# EAGLE board SCK_Base_v1.0 (EAGLE 6.4)
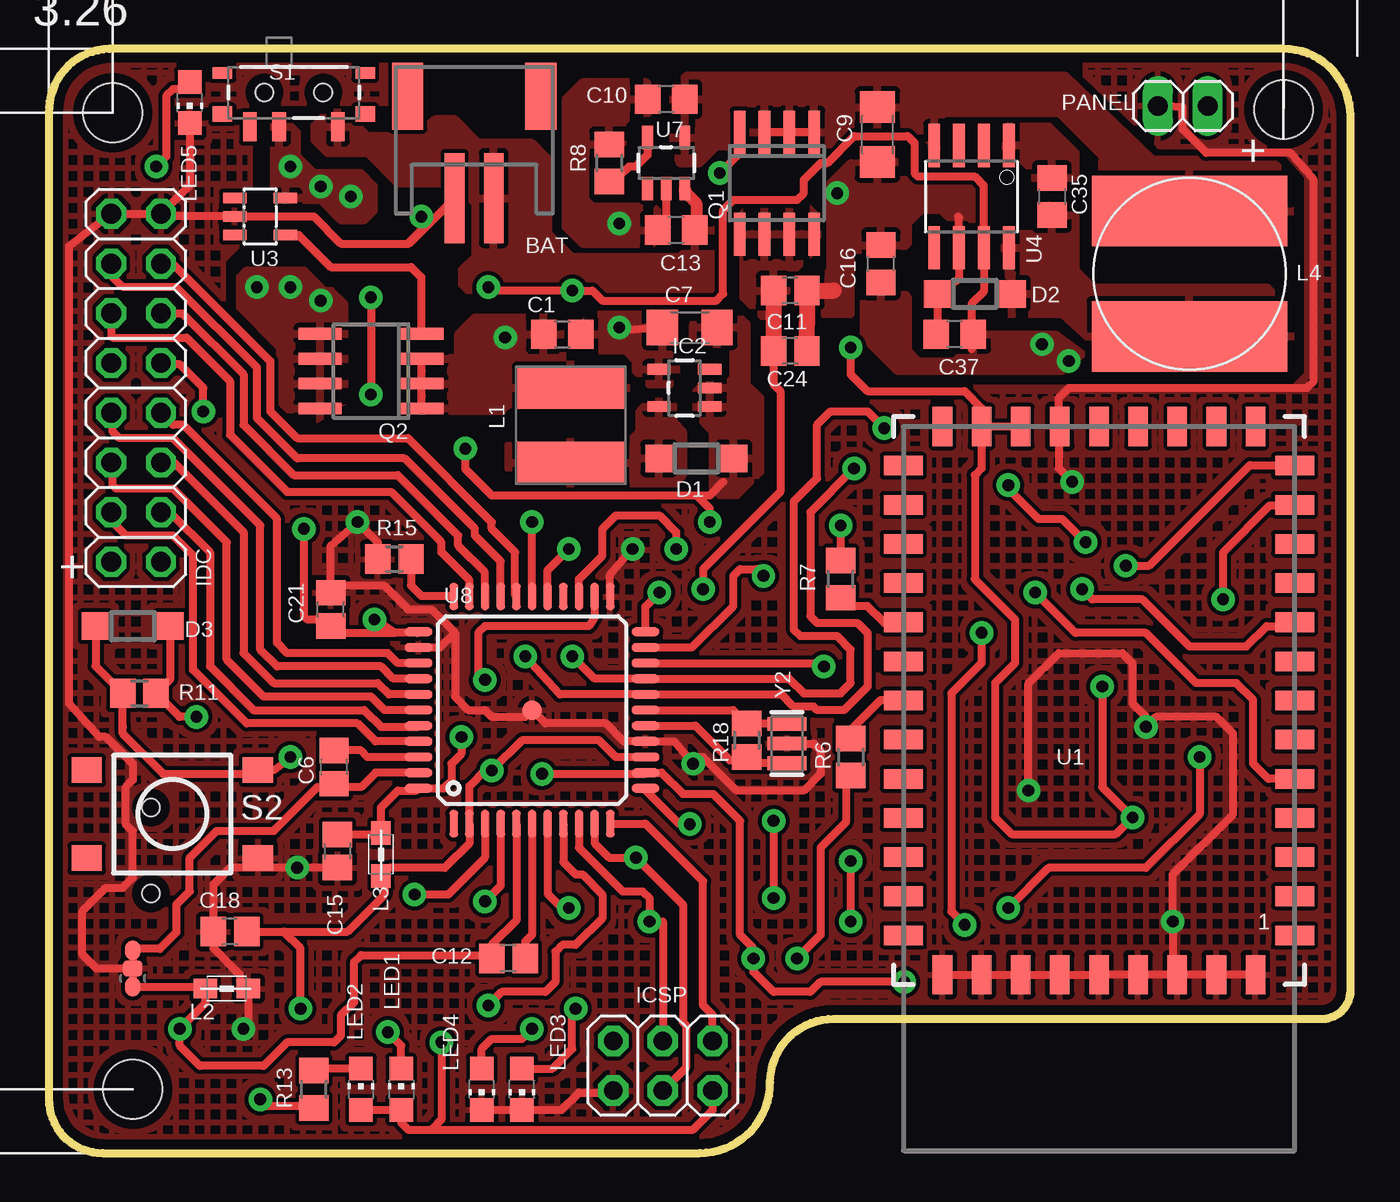
[diagram p0: board, top side]
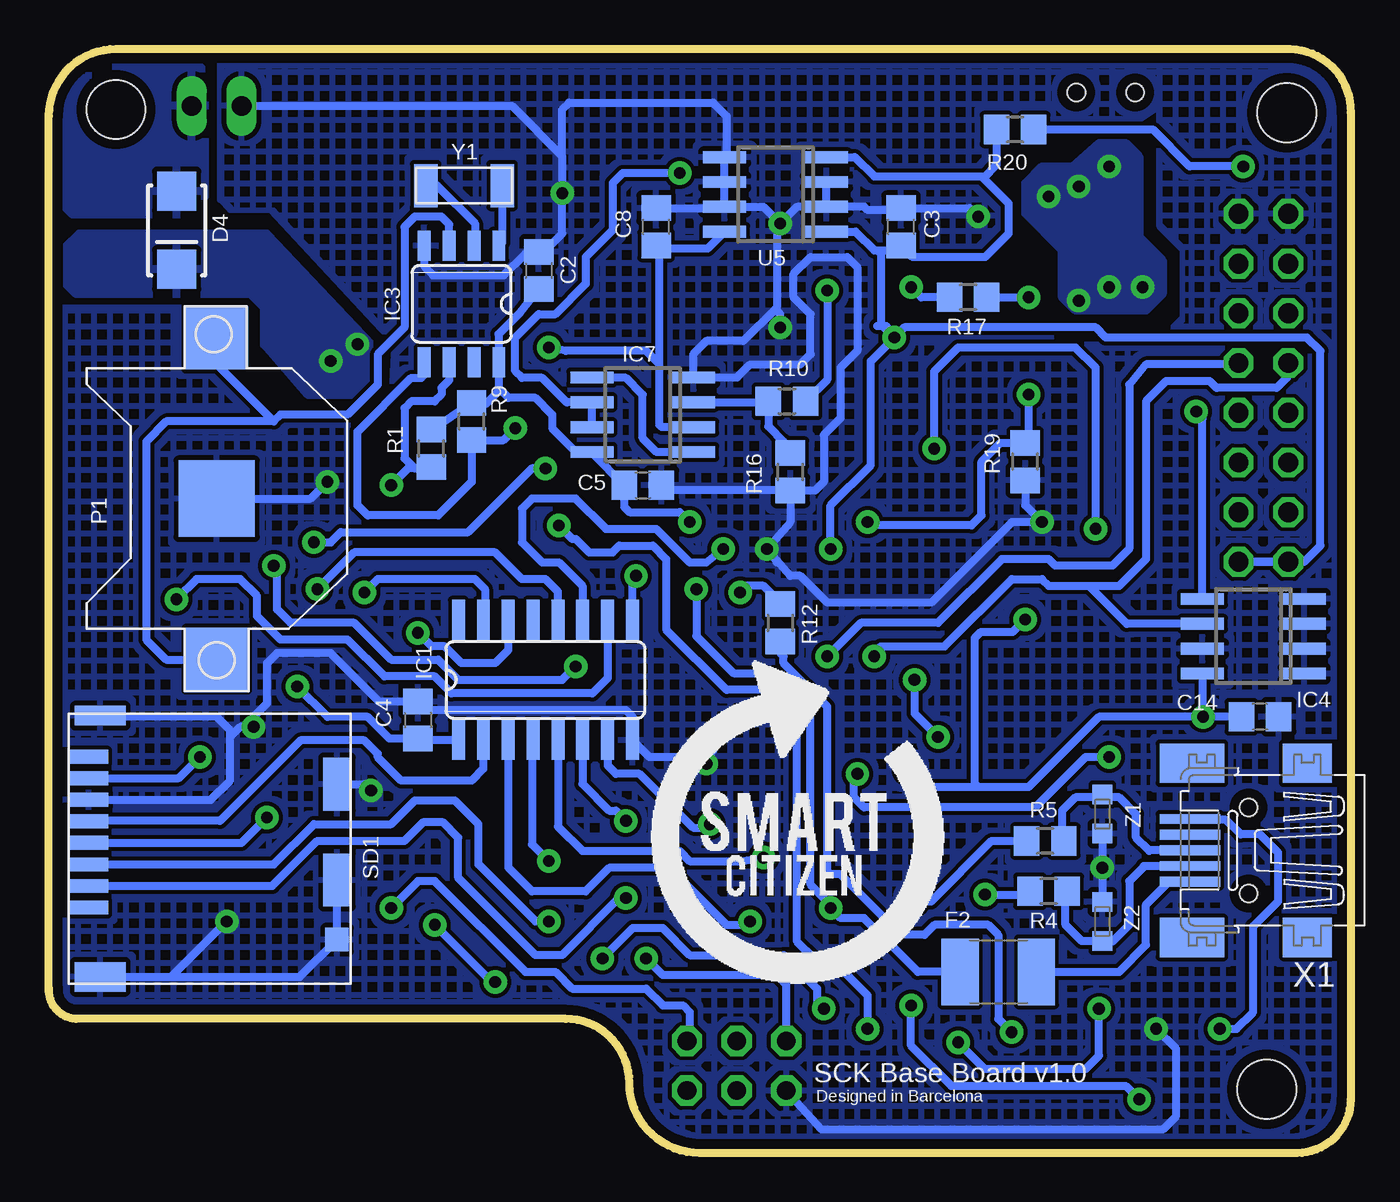
[diagram p1: board, bottom side, seen from below]

Size 66.52 x 56.41 mm. Coordinates in mm from the lower left corner, seen from the top.
Outline: 2.74,0 33.26,0 arc90 36.86,3.6 arc-90 40.12,6.86 65.15,6.86 arc90 66.52,8.4 66.52,52.98 arc90 63.09,56.41 3.09,56.41 arc90 0,53.15 0,2.74 arc90 2.74,0
Copper layers (1*16): Top 0.035mm / dielectric 1.5mm / Bottom 0.035mm
Design rules "default": minimum track width 6mil, minimum drill 0.6mm, track to track 8mil, track to pad 8mil, pad to pad 8mil, via to via 8mil, smd to smd 8mil, copper to edge 20mil, drill to drill 1mm, minimum pad ring 10mil, minimum via ring 0.3mm, stop-mask expansion 4mil, vias tented up to drill 0mil, thermal gap 10mil
Net classes: 1 power: width 0.254 mm, drill 0.6 mm, clearance 0.203 mm; 2 gnd: width 0.254 mm, drill 0.6 mm, clearance 0.203 mm; 3 usbvcc: width 0.254 mm, drill 0.6 mm, clearance 0.203 mm; 4 aref: width 0.254 mm, drill 0.6 mm, clearance 0.203 mm
Holes 3 mm at 3.26,53.15 4.29,3.26 63.09,53.32

## Footprints (pad centres in the part's own frame; a part is rotated, then mirrored left to right if it is on the bottom)
S2B-PH = smd 1 x 4.6: 1 -1,-3.7; 2 1,-3.7 | smd 1.6 x 3.4: NC1 -3.4,1.5; NC2 3.4,1.5
C0805 = smd 1.3 x 1.5: 1 -0.95,0; 2 0.95,0
C0805' = smd 1.3 x 1.5: 1 -0.85,0; 2 0.85,0
C1206 = smd 1.6 x 1.8: 1 -1.4,0; 2 1.4,0
SOD123 = smd 1.4 x 1.4: A 1.9,0; C -1.9,0
SMA-DIODE_ALT = smd 2 x 2: A -2,0; C 2,0
L1812 = smd 1.9 x 3.4: 1 -1.95,0; 2 1.95,0
SO16 = smd 0.66 x 2.032: 1 -4.445,-3.073; 2 -3.175,-3.073; 3 -1.905,-3.073; 4 -0.635,-3.073; 5 0.635,-3.073; 6 1.905,-3.073; 7 3.175,-3.073; 8 4.445,-3.073; 9 4.445,3.073; 10 3.175,3.073; 11 1.905,3.073; 12 0.635,3.073; 13 -0.635,3.073; 14 -1.905,3.073; 15 -3.175,3.073; 16 -4.445,3.073
SOT23-5 = smd 0.55 x 1.2: 1 -0.95,-1.3; 2 0,-1.3; 3 0.95,-1.3; 4 0.95,1.3; 5 -0.95,1.3
SO08-SKINNYPADS = smd 0.66 x 1.524: 1 -1.905,-2.973; 2 -0.635,-2.973; 3 0.635,-2.973; 4 1.905,-2.973; 5 1.905,2.973; 6 0.635,2.973; 7 -0.635,2.973; 8 -1.905,2.973
SO-08 = smd 0.6 x 2.2: 1 -1.905,-2.6; 2 -0.635,-2.6; 3 0.635,-2.6; 4 1.905,-2.6; 5 1.905,2.6; 6 0.635,2.6; 7 -0.635,2.6; 8 -1.905,2.6
SO08 = smd 0.6 x 2.2: 1 -1.905,-2.6; 2 -0.635,-2.6; 3 0.635,-2.6; 4 1.905,-2.6; 5 1.905,2.6; 6 0.635,2.6; 7 -0.635,2.6; 8 -1.905,2.6
2X03 = drill 0.95 pad 1.55 octagon: 1 -2.54,-1.27; 2 -2.54,1.27; 3 0,-1.27; 4 0,1.27; 5 2.54,-1.27; 6 2.54,1.27
2X08 = drill 1.016 octagon: 1 -8.89,-1.27; 2 -8.89,1.27; 3 -6.35,-1.27; 4 -6.35,1.27; 5 -3.81,-1.27; 6 -3.81,1.27; 7 -1.27,-1.27; 8 -1.27,1.27; 9 1.27,-1.27; 10 1.27,1.27; 11 3.81,-1.27; 12 3.81,1.27; 13 6.35,-1.27; 14 6.35,1.27; 15 8.89,-1.27; 16 8.89,1.27
C0R-JMP = smd 0.8 x 1: 1 0,0.938; 3 0,-0.938 | smd 1 x 0.8: 2 0,0
CR54 = smd 5.5 x 2.15: P$1 0,1.92; P$2 0,-1.92
0805 = smd 1.2 x 1: 1 -1.1,0; 2 1.1,0
SDR1006 = smd 10 x 3.6: 1 0,3.2; 2 0,-3.2
CHIP-LED0805 = smd 1.2 x 1.2: A 0,-1.05; C 0,1.05
CR1220-SMD = smd 3.2 x 3.2: +$1 -8.2,0; +$2 8.2,0 | smd 3.9 x 3.9: - 0,0
1X02 = drill 1.016 long: 1 -1.27,0; 2 1.27,0
R0805 = smd 1.3 x 1.5: 1 -0.95,0; 2 0.95,0
R0805' = smd 1.3 x 1.5: 1 -0.85,0; 2 0.85,0
SWITCH-SPST-SMD-A = smd 0.7 x 1.5: 1 -2.25,-1.75; 2 -0.75,-1.75; 3 2.25,-1.75 | smd 1 x 0.6: GND1 -3.65,1; GND3 3.65,1 | smd 1 x 0.8: GND2 -3.65,-1.1; GND4 3.65,-1.1 | hole 0.9: -1.5,0; 1.5,0
TACTILE_SWITCH_TALL = smd 1.55 x 1.3: A1 -4.375,-2.25; A2 4.375,-2.25; B1 -4.375,2.25; B2 4.375,2.25
DM3CS = smd 0.7 x 2: 1 2.54,-5.35; 2 1.44,-5.35; 3 0.34,-5.35; 4 -0.76,-5.35; 5 -1.86,-5.35; 6 -2.96,-5.35; 7 -4.06,-5.35; 8 -5.16,-5.35 | smd 1 x 2.6: 9 -7.26,-4.75 | smd 2.7 x 1.4: 10 -3.76,7.35; 11 1.14,7.35 | smd 1.2 x 1.2: 12 4.19,7.35 | smd 1.5 x 2.6: 13 6.09,-4.75
RN-131G = smd 2 x 1: P$1 -10,11; P$2 -10,9; P$3 -10,7; P$4 -10,5; P$5 -10,3; P$6 -10,1; P$7 -10,-1; P$8 -10,-3; P$9 -10,-5; P$10 -10,-7; P$11 -10,-9; P$12 -10,-11; P$13 -10,-13; P$23 10,-13; P$24 10,-11; P$25 10,-9; P$26 10,-7; P$27 10,-5; P$28 10,-3; P$29 10,-1; P$30 10,1; P$31 10,3; P$32 10,5; P$33 10,7; P$34 10,9; P$35 10,11 | smd 1 x 2: P$14 -8,-15; P$15 -6,-15; P$16 -4,-15; P$17 -2,-15; P$18 0,-15; P$19 2,-15; P$20 4,-15; P$21 6,-15; P$22 8,-15; P$36 8,13; P$37 6,13; P$38 4,13; P$39 2,13; P$40 0,13; P$41 -2,13; P$42 -4,13; P$43 -6,13; P$44 -8,13
SOT23-5L = smd 0.55 x 1.2: 1 -0.95,-1.3; 2 0,-1.3; 3 0.95,-1.3; 4 0.95,1.3; 5 -0.95,1.3
SO8 = smd 0.61 x 2.21: 1 -1.905,-2.616; 2 -0.635,-2.616; 3 0.635,-2.616; 4 1.905,-2.616; 5 1.905,2.616; 6 0.635,2.616; 7 -0.635,2.616; 8 -1.905,2.616
TQFP44-PAD = smd 1.4 x 0.45: 1 -5.8,4; 2 -5.8,3.2; 3 -5.8,2.4; 4 -5.8,1.6; 5 -5.8,0.8; 6 -5.8,0; 7 -5.8,-0.8; 8 -5.8,-1.6; 9 -5.8,-2.4; 10 -5.8,-3.2; 11 -5.8,-4; 23 5.8,-4; 24 5.8,-3.2; 25 5.8,-2.4; 26 5.8,-1.6; 27 5.8,-0.8; 28 5.8,0; 29 5.8,0.8; 30 5.8,1.6; 31 5.8,2.4; 32 5.8,3.2; 33 5.8,4 | smd 0.45 x 1.4: 12 -4,-5.8; 13 -3.2,-5.8; 14 -2.4,-5.8; 15 -1.6,-5.8; 16 -0.8,-5.8; 17 0,-5.8; 18 0.8,-5.8; 19 1.6,-5.8; 20 2.4,-5.8; 21 3.2,-5.8; 22 4,-5.8; 34 4,5.8; 35 3.2,5.8; 36 2.4,5.8; 37 1.6,5.8; 38 0.8,5.8; 39 0,5.8; 40 -0.8,5.8; 41 -1.6,5.8; 42 -2.4,5.8; 43 -3.2,5.8; 44 -4,5.8 | smd 1 x 1: P$1 0,0
32005-201 = smd 3.1 x 0.5: 1 3,1.6; 2 3,0.8; 3 3,0; 4 3,-0.8; 5 3,-1.6 | smd 2.5 x 2: M1 -3,-4.45; M2 -3,4.45 | smd 3.3 x 2: M3 2.9,4.45; M4 2.9,-4.45 | hole 0.9: 0,2.2; 0,-2.2
ABS10 = smd 1.2 x 2.2: 1 -1.9,-0.05; 2 2,-0.05
RESONATOR = smd 0.7 x 2: 1 -1,0; 2 0,0; 3 1,0
CT/CN0603 = smd 1 x 1: 1 -1,0; 2 1,0

## Placement (x,y rotation side)
BAT  [S2B-PH]  21.73,52.49 0 top
C1  10u  [C0805]  26.23,41.83 0 top
C2  100n  [C0805]  41.49,45.09 270 bottom
C3  10u  [C0805]  22.97,47.32 90 bottom
C4  100n  [C0805]  47.66,22.12 270 bottom
C5  100n  [C0805]  36.18,34.12 0 bottom
C6  100n  [C0805']  14.57,19.72 90 top
C7  100u  [C1206]  32.75,42.18 0 top
C8  10u  [C0805]  35.49,47.32 90 bottom
C9  22u  [C1206]  42.35,52.04 90 top
C10  4.7u  [C0805]  31.55,53.84 180 top
C11  10u  [C0805']  37.89,44.06 180 top
C12  1u  [C0805']  23.49,9.94 180 top
C13  4.7u  [C0805]  32.06,47.15 180 top
C14  100n  [C0805]  4.63,22.29 180 bottom
C15  1u  [C0805']  14.74,15.43 270 top
C16  1u  [C0805]  42.52,45.43 90 top
C18  100n  [C0805']  9.26,11.32 180 top
C21  100n  [C0805']  14.4,27.77 90 top
C24  100n  [C0805']  37.89,40.98 180 top
C35  10n  [C0805]  51.26,48.86 270 top
C37  100n  [C0805]  46.29,41.83 180 top
D1  MBR0520LT1G  [SOD123]  33.09,35.49 180 top
D2  MBR0520LT1G  [SOD123]  47.32,43.89 180 top
D3  1N4148  [SOD123]  4.29,26.92 180 top
D4  [SMA-DIODE_ALT]  60,47.14 270 bottom
F2  MF-MSMF050-2 500mA  [L1812]  18,9.26 0 bottom
IC1  4050D  [SO16]  41.15,24.17 0 bottom
IC2  [SOT23-5]  32.48,39.09 90 top
IC3  DS1307SOIC  [SO08-SKINNYPADS]  45.43,43.38 180 bottom
IC4  24LC256SN  [SO-08]  4.97,26.4 90 bottom
IC7  LM358D  [SO08]  36.18,37.72 90 bottom
ICSP  ICSP  [2X03]  31.38,4.46 180 top
IDC  [2X08]  4.46,39.09 90 top
JMP1  0R-JUMPC  [C0R-JMP]  4.29,9.43 180 top
L1  47uH  [CR54]  26.67,37.18 0 top
L2  MH2029-300Y  [0805]  9.09,8.4 0 top
L3  MH2029-300Y  [0805]  16.97,15.26 90 top
L4  82u  [SDR1006]  58.29,44.92 180 top
LED1  Yellow  [CHIP-LED0805]  18,3.26 0 top
LED2  Yellow  [CHIP-LED0805]  15.94,3.26 0 top
LED3  Blue  [CHIP-LED0805]  24.17,3.26 180 top
LED4  Blue  [CHIP-LED0805]  22.12,3.26 180 top
LED5  Green  [CHIP-LED0805]  7.2,53.66 180 top
P1  [CR1220-SMD]  57.95,33.43 90 bottom
PANEL  [1X02]  57.95,53.49 0 top
Q1  [SO-08]  37.2,49.55 180 top
Q2  [SO-08]  16.46,39.95 90 top
R1  4k7  [R0805]  46.98,36 90 bottom
R4  22  [R0805]  15.43,13.37 180 bottom
R5  22  [R0805]  15.6,15.94 180 bottom
R6  220  [R0805]  40.98,20.23 270 top
R7  220  [R0805]  40.46,29.32 90 top
R8  2k  [R0805]  28.63,50.58 270 top
R9  4k7  [R0805]  44.92,37.38 90 bottom
R10  10k  [R0805]  28.8,38.4 0 bottom
R11  10k  [R0805']  4.63,23.49 0 top
R12  1k  [R0805]  29.15,27.09 270 bottom
R13  1k  [R0805]  13.54,3.26 90 top
R15  10k  [R0805']  17.66,30.35 0 top
R16  10k  [R0805]  28.63,34.8 90 bottom
R17  20k  [R0805]  19.55,43.72 180 bottom
R18  1M  [R0805']  35.66,21.09 270 top
R19  10k  [R0805]  16.63,35.32 90 bottom
R20  1k  [R0805]  17.14,52.29 180 bottom
S1  [SWITCH-SPST-SMD-A]  12.52,54.18 0 top
S2  SWITCH-MOMENTARY-2  [TACTILE_SWITCH_TALL]  6.31,17.32 0 top
SD1  SD_CARD_SOCKETDM3CS  [DM3CS]  59.15,15.09 270 bottom
U1  RN-131G  [RN-131G]  53.66,22.12 180 top
U3  TPS2400  [SOT23-5L]  10.79,47.85 270 top
U4  LM2674  [SO8]  47.15,48.86 180 top
U5  MAX604ESA  [SO-08]  29.39,48.97 90 bottom
U7  MCP73831  [SOT23-5]  31.55,50.58 0 top
U8  ATMEGA32U4-XUAU  [TQFP44-PAD]  24.69,22.63 90 top
X1  MINI-USB-32005-201  [32005-201]  5.21,15.46 180 bottom
Y1  32.768KHz  [ABS10]  45.26,49.38 180 bottom
Y2  CSTCE16M0V53-R0 16MHZ  [RESONATOR]  37.72,20.92 90 top
Z1  CG0603MLC-05E  [CT/CN0603]  12.69,17.32 270 bottom
Z2  CG0603MLC-05E  [CT/CN0603]  12.69,11.83 90 bottom

## Library data of the parts
BAT U1 = SparkFun
C1-C5 C7-C10 C13 C14 C16 C35 C37 F2 R1 R4-R10 R12 R13 R16 R17 R19 R20 = rcl
C6 C11 C12 C15 C18 C21 C24 ICSP R11 R15 R18 U8 Y2 = SmartPrj
D1-D3 = diode
D4 = SparkFun-DiscreteSemi
IC1 = 40xx
IC2 L1 = SparkFunEagle-3-30-09
IC3 P1 = adafruit
IC4 = microchip; MF: MICROCHIP; MPN: 24LC256-I/SN; OC_FARNELL: 9757996; OC_NEWARK: 27C9144
IC7 = linear
IDC PANEL = pinhead
JMP1 = jump-0r-smd
L2 L3 = wuerth-elektronik
L4 SD1 U4 U5 Y1 = Hangar
LED1-LED5 = led
Q1 Q2 = transistor-power
S1 S2 = SparkFun 13-1-2012
U3 = texas-msp
U7 = SparkFun-PowerIC
X1 = con-cypressindustries; OC_FARNELL: unknown; OC_NEWARK: unknown
Z1 Z2 = varistor

## Nets
3V3: C4.2 C8.1 IC1.1 IC7.2 SD1.4 U1.P$20 U1.P$21 U5.8
+5V [usbvcc]: C2.2 C5.1 C7.2 C14.2 C18.1 C21.1 D1.C D3.C IC2.1 IC2.2 IC3.8 IC4.8 IC7.8 ICSP.2 L3.1 LED1.A LED2.A R1.2 R9.2 R11.2 U8.2 U8.14 U8.34
AGND: C6.1 JMP1.3 U8.43
AREF [aref]: C6.2 U8.42
AVCC: C15.1 L3.2 U8.24 U8.44
CS_MMC: IC1.7 U8.12
D7: U8.1
D12: U8.26
D+: R5.1 X1.3 Z1.1
D-: R4.1 X1.2 Z2.1
GATE_CMD: IC7.6 IC7.7 Q1.4
GND: BAT.1 C1.2 C2.1 C3.2 C4.1 C5.2 C7.1 C8.2 C9.1 C10.2 C11.1 C13.2 C14.1 C15.2 C16.2 C18.2 C21.2 C24.1 C37.2 D2.A IC1.8 IC2.4 IC3.4 IC4.1 IC4.2 IC4.3 IC4.4 IC4.7 IC7.4 ICSP.6 IDC.15 IDC.16 JMP1.2 L2.2 LED3.C LED4.C LED5.C P1.- PANEL.1 R8.1 R15.1 R16.1 R19.1 S2.A2 SD1.6 SD1.9 SD1.10 SD1.11 SD1.12 SD1.13 U1.P$19 U1.P$36 U1.P$37 U1.P$38 U1.P$39 U1.P$40 U1.P$41 U1.P$42 U1.P$43 U1.P$44 U3.2 U4.6 U5.2 U5.3 U5.5 U5.6 U5.7 U7.2 U8.15 U8.23 U8.35 U8.P$1 Y2.2 Z1.2 Z2.2
GPIO-4: R6.1 U1.P$29
GPIO-6: R7.1 U1.P$27
HWB: R15.2 U8.33
IO0: IDC.11 U8.31
IO1: IDC.12 U8.32
IO2: IDC.13 U8.29
IO3: IDC.14 U8.30
MISO: ICSP.1 SD1.7 U8.11
MOSI: IC1.5 ICSP.4 U8.10
N$1: IC1.10 U1.P$12
N$2 [usbvcc]: LED1.C R12.2
N$3 [power]: D4.A PANEL.2
N$4 [usbvcc]: LED2.C R13.2
N$5: IC7.3 R10.1 R16.2
N$6: LED4.A R7.2
N$7: IC7.1 IC7.5
N$8: LED3.A R6.2
N$9: IC1.6 SD1.2
N$11: IC1.2 SD1.5
N$12: IC1.4 SD1.3
N$13: R8.2 U7.5
N$14: IC1.12 U1.P$9
N$15: IC1.15 U1.P$5
N$16: IC3.1 Y1.1
N$17: IC3.2 Y1.2
N$18: IC3.3 P1.+$1 P1.+$2
N$19 [usbvcc]: C9.2 C10.1 L4.2 Q1.1 Q1.2 Q1.3 U4.4 U7.4
N$20: LED5.A R20.1
N$30: Q2.4 U3.4
N$31: D1.A IC2.5 L1.P$2
N$47: C35.1 U4.1
N$54: C35.2 D2.C L4.1 U4.8
P_LEVEL: R17.1 R19.2 U8.28
RD+: R5.2 U8.4
RD-: R4.2 U8.3
RESET: D3.A IC1.14 ICSP.5 R11.1 S2.B2 U8.13
RXBEE: U1.P$13 U8.20
RXLED: R13.1 U8.8
S0: IDC.3 U8.40
S1: IDC.4 U8.41
S2: IDC.5 U8.38
S3: IDC.6 U8.39
S4: IDC.7 U8.36
S5: IDC.8 U8.37
SCK: IC1.3 ICSP.3 U8.9
SCL: IC3.6 IC4.6 IDC.10 R1.1 U8.18
SDA: IC3.5 IC4.5 IDC.9 R9.1 U8.19
SLEEP: IC1.11 U8.25
TXBEE: IC1.9 U8.21
TXLED: R12.1 U8.22
UCAP: C12.1 U8.6
UGND [gnd]: C12.2 JMP1.1 L2.1 U8.5 X1.5
VBAT: BAT.2 C13.1 S1.3 U7.3
VBAT1: C1.1 C3.1 IDC.1 IDC.2 L1.P$1 Q2.1 Q2.2 Q2.3 R20.2 U5.1 U5.4 U8.27
VIN [power]: C16.1 C37.1 D4.C R10.2 R17.2 U4.7
VTPS: Q2.5 Q2.6 Q2.7 Q2.8 S1.2 U3.5
VUSB: C11.2 C24.2 F2.1 Q1.5 Q1.6 Q1.7 Q1.8 U8.7
XTAL1: R18.1 U8.17 Y2.3
XTAL2: R18.2 U8.16 Y2.1
XUSB [usbvcc]: F2.2 X1.1

## Tracks (layer width: path | path; a pad name or v marks a point on that pad's centre or on a via)
3V3  (via drill 0.6)
  Top 0.406: v53.84,23.83 53.84,18.69 v55.38,17.15 54.52,16.29 49.21,16.29 48.35,17.15 48.35,24 49.38,25.03 49.38,27.26 47.32,29.32 47.32,34.63 47.66,34.98 U1.P$21 | v40.98,41.15 40.98,39.78 41.83,38.92 46.81,38.92 47.66,38.06 U1.P$21 | U1.P$21 U1.P$20
  Bottom 0.406: 53.32,23.32 v53.84,23.83 52.29,22.29 50.23,22.29 49.11,21.17 C4.2 47.6,21.1 IC1.1 | v55.38,17.15 56.68,15.85 SD1.4 | IC7.2 35.2,37.08 35.32,37.21 35.32,40.29 | 35.32,40.29 35.32,43.14 35.33,43.15 35.33,46.21 | 35.33,46.21 C8.1 | 35.33,46.21 32.85,46.21 U5.8 | 35.32,40.29 36,40.98 40.12,40.98 v40.98,41.15
+5V  (via drill 0.6)
  Top 0.406: 17.66,26.58 14.74,26.58 C21.1 14.07,27.26 13.2,27.26 13.03,27.43 v13.03,31.89 | U8.34 18.83,26.58 17.66,26.58 | 17.66,26.58 v16.63,27.26 | v7.54,22.29 6.68,22.29 R11.2 6.19,24.2 D3.C | ICSP.2 33.92,2.2 32.92,1.2 19.55,1.2 | LED2.A LED1.A 18,1.54 18.35,1.2 19.55,1.2 | U8.14 28.97,20.23 28.12,21.09 24.17,21.09 v22.63,19.55 22.29,19.55 21.49,18.75 U8.2 21.49,15.83 20.23,14.57 17.39,14.57 L3.1 17.15,13.99 17.15,13.2 15.26,11.32 12,11.32 | v20.06,5.66 20.06,1.71 19.55,1.2 | C18.1 12,11.32 | v12.86,7.37 12.86,10.46 12,11.32 | 33.09,33.6 22.63,33.6 21.28,34.96 v21.28,35.99 | 33.09,33.6 33.78,33.6 34.46,34.29 | v33.78,32.23 33.78,32.92 33.09,33.6
  Bottom 0.406: R1.2 R9.2 44.83,38.23 44.23,38.23 43.55,38.92 43.55,39.09 | 43.49,40.4 IC3.8 43.55,40.42 | 43.55,40.42 43.55,39.09 | 43.55,39.09 43.03,38.58 41.66,38.58 40.81,37.72 40.81,37.03 39.61,35.83 38.8,35.83 IC7.8 38.78,35.77 C5.1 37.13,33.01 36.86,32.75 34.29,32.75 v33.78,32.23 | C2.2 42.44,42.94 43.55,41.83 43.55,40.42 | v13.03,31.89 13.03,40.12 14.06,41.15 20.06,41.15 21.28,39.93 v21.28,35.99 | v20.06,5.66 18.69,4.29 13.54,4.29 12.86,4.97 v12.86,7.37 | v7.54,22.29 12.86,22.29 16.46,18.69 19.03,18.69 | 19.03,18.69 21.77,18.69 v22.63,19.55 | 19.03,18.69 19.2,18.86 19.2,26.32 U8.34 17.26,26.63 v16.63,27.26 | C14.2 v7.54,22.29 | IC4.8 7.57,22.32 v7.54,22.29
  pour Top: 32.92,41.66 32.92,42.35 33.43,42.86 35.15,42.86 35.66,42.35 35.66,39.26 36.35,38.58 36.35,34.8 35.15,33.6 34.29,33.6 33.95,33.95 33.95,36.86 33.09,37.72 33.09,38.92 33.43,39.26 34.63,39.26 34.98,39.6 34.98,40.98 34.63,41.32 33.26,41.32
AGND
  Top 0.406: U8.43 16.69,19.43 15.94,18.69 14.75,18.69 C6.1 14.39,18.69 13.72,18.69 11.49,16.46 8.57,16.46 7.2,15.09 7.2,13.37 6.52,12.69 6.52,11.27 5.67,10.43 4.34,10.43 JMP1.3
AREF
  Top 0.406: U8.42 16.29,20.23 15.94,20.57 14.58,20.57 C6.2
AVCC  (via drill 0.6)
  Top 0.406: C15.1 16.97,16.28 L3.2 16.97,17.66 17.83,18.52 18.77,18.52 U8.44 20.17,18.63 20.57,19.03 20.57,19.89 21.09,20.4 v21.09,21.26 | U8.24 27.89,27.37 27.6,26.92 22.29,26.92 21.95,26.58 21.95,24.52 v22.29,24.17
  Bottom 0.406: v22.29,24.17 22.29,22.46 v21.09,21.26
CS_MMC  (via drill 0.6)
  Top 0.406: U8.12 30.49,18.55 32.23,16.8 v32.75,16.8
  Bottom 0.406: IC1.7 37.97,19.8 37.55,19.37 36.35,19.37 33.6,16.63 32.92,16.63 v32.75,16.8
D+
  Bottom 0.406: 14.62,15.97 R5.1 14.74,16.04 14.74,17.49 14.06,18.17 12.66,18.17 | 12.66,18.17 11.83,18.17 10.97,17.32 10.97,16.12 10.29,15.43 10.29,15.46 X1.3 | 12.66,18.17 Z1.1
D-
  Bottom 0.406: R4.1 14.57,13.28 14.57,11.66 13.74,10.83 Z2.1 12.66,10.8 12.17,10.8 11.32,11.66 11.32,13.89 10.57,14.63 10.57,14.66 X1.2
GATE_CMD  (via drill 0.6)
  Top 0.406: Q1.4 35.3,51.07 v34.29,50.06
  Bottom 0.406: IC7.7 IC7.6 40.07,38.35 41.32,39.61 42.35,39.61 42.69,39.95 42.69,41.66 41.49,42.86 40.63,42.86 39.09,44.41 39.09,45.78 37.72,47.15 37.72,49.55 37.2,50.06 v34.29,50.06
GND  (via drill 0.6)
  Top 0.406: C21.2 14.4,31.03 v15.77,32.23 16.8,31.2 R15.1 | 20.75,26.58 19.55,27.78 18.35,27.78 17.15,28.98 14.41,28.98 C21.2 | U8.35 20,25.83 20.75,26.58 | C21.2 14.22,28.8 | ICSP.6 28.73,3.09 27.09,3.09 26.21,2.21 LED3.C LED4.C | C15.2 v12.69,14.58 9.27,14.58 8.4,13.72 8.4,11.32 C18.2 8.41,10.45 9.77,9.09 9.77,8.82 L2.2 10.19,6.59 v9.94,6.34 | IDC.15 IDC.16 1.03,46.34 1.03,22.97 2.57,21.26 2.91,21.26 4.29,19.89 4.29,19.06 3.93,18.71 3.93,16.8 4.29,16.44 4.29,14.06 3.77,13.54 2.91,13.54 1.71,12.34 1.71,10.15 2.43,9.44 JMP1.2 | C37.2 45.42,42.6 D2.A 46.51,44.64 U4.6 46.51,47.78 46.46,47.83 | IDC.15 5.86,47.85 U3.2 13.53,47.85 14.92,46.46 18.41,46.46 | 18.41,46.46 BAT.1 | 20.75,26.58 20.75,23.32 21.43,22.63 22.29,22.63 22.63,22.29 24.35,22.29 U8.P$1 25.37,21.95 28.46,21.95 29.37,21.03 U8.15 31.95,21.03 v32.92,19.89 33.26,20.23 33.43,20.23 35.15,18.52 38.58,18.52 39.43,19.37 39.43,20.57 39.09,20.92 Y2.2 | C7.1 29.32,42.01 v29.15,42.18 | 18.41,46.46 18.41,46.52 19.2,47.32 19.2,47.66 v19.03,47.83 | U1.P$36 U1.P$37 U1.P$38 U1.P$39 U1.P$40 U1.P$41 U1.P$42 | U1.P$42 U1.P$43 U1.P$44 | U1.P$42 57.44,9.35 v57.44,11.83 57.44,14.23 60.52,17.32 60.52,21.43 59.66,22.29 56.58,22.29 v56.06,21.77 56.06,22.29 55.38,22.97 55.38,25.03 54.86,25.55 51.61,25.55 50.06,24 v50.06,18.52 | 51.61,37.06 U1.P$19 | U8.23 28.69,29.55 v29.83,30.86 | 51.61,37.06 51.61,34.98 v52.29,34.29 | C24.1 | LED5.C 7.2,49.45 IDC.15 | 51.61,37.06 51.61,38.58 52.12,39.09 64.29,39.09 64.64,39.43 64.64,49.72 63.44,51.09 59.15,51.09 57.95,52.29 57.95,53.42 PANEL.1 | U7.2 31.55,47.58 C13.2 | JMP1.2 4.29,8.57
  Top 0.406: 4.29,10.29 JMP1.2
  Top 0.813: C24.1 38.75,42.39 38.74,42.4 C11.1 40.12,44.06
  Bottom 0.406: R16.1 34.98,33.85 C5.2 | U5.7 U5.6 U5.5 31.89,50.98 31.89,52.98 32.58,53.66 39.95,53.66 40.29,53.32 40.29,50.92 | 35.28,48.48 C8.2 | 29.4,43.12 29.32,43.21 29.32,47.32 v29.15,47.49 | 29.4,43.12 31.03,41.49 32.92,41.49 33.6,40.81 33.6,39.65 IC7.4 31.36,39.62 30.69,40.29 28.12,40.29 27.6,40.81 27.6,42.86 28.46,43.72 28.46,44.92 27.6,45.78 25.72,45.78 25.2,45.26 25.2,40.98 26.06,40.12 26.06,37.55 26.92,36.69 26.92,34.29 27.35,33.85 R16.1 | v19.03,47.83 19.47,48.27 C3.2 23.07,48.18 24.69,48.18 24.86,48.35 U5.2 | v29.15,42.18 29.15,42.86 29.4,43.12 | v57.44,11.83 60.27,9 SD1.13 53.7,9 SD1.12 SD1.11 | SD1.6 58.25,18.05 57.26,19.03 57.26,21.26 | 57.26,21.26 57.26,21.6 57.95,22.29 63.84,22.29 SD1.9 | 57.26,21.26 56.75,21.77 v56.06,21.77 56.06,22.29 55.38,22.97 55.38,25.03 54.86,25.55 52.12,25.55 49.64,23.07 C4.1 47.23,22.63 37.03,22.63 36.69,22.29 36.69,21.11 IC1.8 35.83,20.23 32.92,20.23 32.58,20.57 v32.92,19.89 | SD1.10 50.39,18.85 v50.06,18.52 | Z2.2 Z1.2 v12.69,14.58 | P1.- 53.15,33.43 v52.29,34.29 | R16.1 28.63,32.23 v29.83,30.86 | IC3.4 47.32,46.33 47.32,45.26 46.9,44.84 43.28,44.84 42.18,45.95 41.58,45.95 C2.1 41.23,46.04 40.29,46.98 v40.29,49.04 40.29,50.92 | R19.1 16.63,33.09 v15.77,32.23 17.32,32.23 21.43,28.12 26.75,28.12 28.12,29.49 28.63,29.49 v29.83,30.86 | ICSP.6 27.02,1.2 9.6,1.2 8.92,1.89 8.92,5.32 v9.94,6.34 | 28.81,47.48 v29.15,47.49 | 29.48,47.48 v29.15,47.49 | 35.01,48.75 C8.2 | U5.2 U5.3 | U5.7 29.99,48.34 v29.15,47.49 | U5.2 28.3,48.34 v29.15,47.49 | 29.32,30.18 v29.83,30.86 | PANEL.1 42.86,53.49 40.29,50.92 | C8.2 32.06,48.27 U5.7
  pour Bottom (hatched): -2.4,56.24 -2.91,-1.37 66.87,-1.71 67.21,42.69 66.69,43.21 57.09,43.21 56.75,42.86 56.75,40.98 56.24,40.46 56.24,40.29 53.84,37.89 49.03,37.89 48.86,41.32 55.21,48.18 57.26,48.18 57.78,48.69 57.78,56.41 57.26,56.92 48.18,56.92 10.97,56.41 9.94,55.89 9.94,53.32 10.97,52.64 13.03,52.64 14.23,51.44 16.12,51.44 17.49,50.06 17.49,47.49 15.77,45.78 15.77,42.18 14.92,41.32 9.94,41.32 8.57,42.69 8.57,46.12 9.77,47.32 9.77,55.89 9.43,56.24
  pour Top (hatched): 66.87,56.06 52.98,56.24 52.98,55.04 56.75,51.44 62.92,51.44 64.29,49.89 64.29,39.78 63.61,39.09 37.72,39.09 37.2,38.58 37.2,34.29 35.49,32.58 33.43,32.58 32.75,33.26 23.32,33.26 22.29,34.29 22.29,36.52 21.95,36.86 12.34,36.86 11.14,38.06 11.32,40.46 8.92,42.86 8.92,45.61 10.29,46.98 10.29,52.64 11.32,53.66 21.43,53.66 21.95,53.15 25.55,53.15 25.55,54.18 23.49,56.24 -2.06,56.06 -2.06,-1.37 66.87,-1.37
  pour Top: 39.6,42.86 39.6,44.75 39.95,45.09 39.95,49.55 40.98,50.58 41.49,50.58 42.01,51.09 42.86,51.09 43.21,50.75 43.21,50.23 43.72,49.72 48.69,49.72 48.86,49.55 48.86,48.86 47.49,47.49 46.29,47.49 45.61,48.18 44.58,48.18 43.89,47.49 43.89,46.46 43.55,46.12 41.15,46.12 40.98,45.95 40.98,42.86
  pour Top: 31.03,53.49 31.03,54.18 30.52,54.69 27.26,54.69 26.4,53.84 26.4,47.32 27.26,46.46 30.86,46.46 31.03,46.63 30.69,46.98 31.72,47.49 30.86,48.35 27.77,48.35 27.43,48.69 27.43,50.75 27.77,51.09 28.8,51.09 29.32,51.61 29.32,52.64 29.83,53.15 30.69,53.15
  pour Top: 27.26,41.49 27.26,42.35 27.77,42.86 31.2,42.86 31.55,42.52 31.55,40.98 32.06,40.46 32.06,39.6 31.72,39.26 30.69,39.26 30,39.95 30,40.46 29.49,40.98 27.77,40.98
GPIO-4
  Top 0.406: R6.1 40.98,21.6 42.52,23.15 43.64,23.15 U1.P$29
GPIO-6
  Top 0.406: U1.P$27 43.64,27.09 42.69,27.09 41.83,27.95 40.54,27.95 R7.1
HWB
  Top 0.406: R15.2 18.51,28.98 19.03,28.46 20.66,28.46 U8.33
IO0
  Top 0.406: IDC.11 6.82,42.9 9.94,39.78 9.94,37.21 12.52,34.63 17.83,34.63 20.92,31.55 20.92,31.03 22.29,29.66 U8.31
IO1
  Top 0.406: IDC.12 3.19,41.73 3.26,41.66 7.03,41.66 9.26,39.43 9.26,36.69 12.17,33.78 17.49,33.78 20.06,31.2 20.06,30.69 21.49,29.26 U8.32
IO2
  Top 0.406: IDC.13 6.34,45.44 11.32,40.46 11.32,37.89 12.69,36.52 18.35,36.52 22.63,32.23 22.63,31.89 23.83,30.69 23.83,28.49 U8.29
IO3
  Top 0.406: IDC.14 3.26,45.37 3.26,44.75 3.77,44.23 6.52,44.23 10.63,40.12 10.63,37.55 12.69,35.49 18.17,35.49 21.77,31.89 21.77,31.55 23.09,30.23 U8.30
MISO  (via drill 0.6)
  Top 0.406: ICSP.1 33.92,7.06 33.43,7.54 33.43,13.89 30.49,16.83 U8.11 | v58.81,20.23 58.81,17.32 56.06,14.57 51.09,14.57 v49.03,12.52
  Bottom 0.406: SD1.7 59.89,19.15 v58.81,20.23 | ICSP.1 33.78,5.87 33.78,7.2 34.12,7.54 35.15,7.54 36,8.4 39.78,8.4 40.63,9.26 42.18,9.26 46.81,13.89 47.66,13.89 v49.03,12.52
MOSI  (via drill 0.6)
  Top 0.406: U8.10 27.89,15.83 28.63,15.09 v30,15.09 32.4,12.69 32.4,6.69 32.58,6.52 32.58,4.39 ICSP.4
  Bottom 0.406: IC1.5 40.51,16.68 39.26,15.43 34.29,15.43 33.78,14.92 31.2,14.92 v30,15.09
N$1  (via drill 0.6)
  Top 0.406: v60.01,28.29 60.01,30.69 62.41,33.09 63.64,33.09 U1.P$12
  Bottom 0.406: IC1.10 37.97,24.26 38.75,23.49 45.95,23.49 46.81,24.35 49.38,24.35 51.26,26.23 54.69,26.23 55.89,27.43 55.89,28.46 56.75,29.32 58.98,29.32 v60.01,28.29
N$2  (via drill 0.6)
  Top 0.406: LED1.C 18,5.49 v17.32,6.17
  Bottom 0.406: R12.2 29.15,25.55 28.98,25.38 28.98,25.03 26.75,22.8 26.75,14.4 26.57,14.23 26.06,14.23 22.97,11.14 21.77,11.14 21.26,11.66 18.52,11.66 18,11.14 18,6.86 v17.32,6.17
N$3
  pour Bottom: 58.43,55.08 58.43,55.14 58.84,55.54 64.11,55.54 65.15,54.5 65.15,54.44 66.02,53.57 66.02,48.65 65.32,47.95 59.47,47.95 58.55,48.88 58.55,54.9 58.49,54.96
N$4
  Top 0.406: LED2.C 13.54,4.31 R13.2
N$5
  Bottom 0.406: IC7.3 29.8,38.35 R10.1 29.75,37.13 28.98,36.35 28.98,36.1 R16.2
N$6  (via drill 0.6)
  Top 0.406: LED4.A 22.12,5.32 22.63,5.83 24.17,5.83 v24.69,6.34 | v40.46,32.06 R7.2
  Bottom 0.406: v24.69,6.34 24.69,8.06 26.57,9.94 27.43,9.94 28.29,10.8 28.29,22.29 29.66,23.66 31.89,23.66 34.98,26.75 34.98,30.35 35.66,31.03 37.38,31.03 37.72,30.69 38.92,30.69 39.61,31.38 39.78,31.38 v40.46,32.06
N$7
  Bottom 0.406: IC7.1 35.47,35.81 36.18,36.52 36.18,38.75 37.03,39.61 38.76,39.61 IC7.5
N$8  (via drill 0.6)
  Top 0.406: R6.2 40.73,19.03 40.73,16.9 39.43,15.6 39.43,11.14 v38.23,9.94 38.75,10.46 | LED3.A 25.74,4.31 26.75,5.32 26.75,7.2 v26.92,7.37
  Bottom 0.406: v26.92,7.37 27.26,7.72 27.26,8.4 28.98,10.12 33.78,10.12 35.15,11.49 36.69,11.49 v38.23,9.94
N$9  (via drill 0.6)
  Top 0.406: v37.03,16.97 v37.03,13.03
  Bottom 0.406: SD1.2 55.1,13.65 52.81,15.95 48.35,15.95 47.41,16.89 46.38,16.89 45.61,16.12 45.61,14.06 41.66,10.12 40.29,10.12 37.38,13.03 v37.03,13.03 | IC1.6 39.26,21.08 39.26,18.86 37.89,17.49 37.55,17.49 v37.03,16.97
N$11
  Bottom 0.406: IC1.2 44.32,19.63 44.92,19.03 48.52,19.03 49.72,20.23 49.72,20.4 50.41,21.09 53.66,21.09 57.78,16.97 64.47,16.97 SD1.5
N$12  (via drill 0.6)
  Top 0.406: v40.98,14.92 v40.98,11.83
  Bottom 0.406: SD1.3 55.03,14.75 52.98,16.8 49.03,16.8 47.83,18 45.78,18 44.58,16.8 44.58,14.75 41.66,11.83 v40.98,11.83 | IC1.4 41.83,21.05 41.83,15.77 v40.98,14.92
N$13
  Top 0.406: R8.2 28.9,49.89 29.15,49.89 29.66,50.41 30,50.41 30.6,51 U7.5
N$14  (via drill 0.6)
  Top 0.406: 63.64,27.09 U1.P$9 63.46,26.92 62.24,26.92 61.21,25.89 58.29,25.89 55.89,28.29 53.32,28.29 v52.81,28.8
  Bottom 0.406: IC1.12 40.51,28.68 41.15,29.32 42.35,29.32 43.72,30.69 50.92,30.69 v52.81,28.8
N$15  (via drill 0.6)
  Top 0.406: U1.P$5 62.32,19.12 61.55,19.89 61.55,23.15 60.69,24 58.64,24 56.06,26.58 52.46,26.58 v50.41,28.63
  Bottom 0.406: IC1.15 44.23,27.34 44.23,28.8 44.75,29.32 49.72,29.32 v50.41,28.63
N$16
  Bottom 0.406: Y1.1 43.36,46.52 IC3.1
N$17
  Bottom 0.406: Y1.2 46.68,49.43 44.75,47.49 44.75,46.4 IC3.2
N$18
  Bottom 0.406: IC3.3 46.07,47.44 46.46,47.83 47.83,47.83 48.35,47.32 48.35,42.18 49.72,40.81 49.72,39.26 51.26,37.72 54.69,37.72 55.04,37.38 | 55.04,37.38 57.95,40.29 P1.+$2 | 55.04,37.38 60.52,37.38 61.55,36.35 61.55,26.23 60.52,25.2 57.98,25.2 P1.+$1
N$19
  Top 0.406: Q1.1 Q1.2 Q1.3
  pour Top: 54.01,47.49 62.92,47.49 63.44,48.01 63.44,49.89 62.41,50.75 56.41,50.75 51.95,55.04 32.58,55.04 31.89,54.35 31.89,51.26 32.23,50.58 33.26,50.58 34.12,51.44 40.46,51.44 41.32,52.29 43.38,52.29 43.55,52.46 44.23,52.46 45.09,51.61 45.09,50.75 45.43,50.75 45.26,52.64 45.78,53.15 51.61,53.15 53.84,50.92 53.66,47.83
N$20  (via drill 0.6)
  Top 0.406: LED5.A 6.84,54.35 6.34,54.35 6,54.01 6,50.92 v5.49,50.41
  Bottom 0.406: R20.1 10.12,52.29 8.23,50.41 v5.49,50.41
N$30
  Top 0.406: U3.4 12.77,46.9 14.4,45.26 18.52,45.26 19.03,44.75 19.03,41.88 Q2.4
N$31
  pour Top: 23.66,36.35 29.66,36.35 30.18,36.86 30.18,37.89 30.69,38.4 31.72,38.4 31.89,38.23 31.89,37.38 32.4,36.86 32.4,34.63 31.89,34.12 24.35,34.12 23.49,34.98 23.49,36.18
N$47
  pour Top: 49.03,52.46 51.09,52.46 52.46,51.09 52.46,49.89 51.95,49.38 50.75,49.38 50.41,49.72 50.41,50.06 49.72,50.75 49.21,50.75 48.86,51.09
N$54
  pour Top: 48.52,42.86 48.52,44.58 48.86,44.92 48.86,46.98 50.58,46.98 50.92,48.52 52.46,47.83 52.46,45.09 53.32,44.23 62.24,44.23 63.44,43.03 63.44,41.15 62.75,40.46 54.01,40.81 51.78,42.86
P_LEVEL  (via drill 0.6)
  Top 0.406: U8.28 v24.69,32.23 | v16.46,43.72 v16.46,38.75
  Bottom 0.406: v24.69,32.23 24.69,32.06 19.37,32.06 18.86,32.58 18.86,35.33 17.92,36.27 R19.2 16.46,36.44 v16.46,38.75 | R17.1 v16.46,43.72
RD+  (via drill 0.6)
  Top 0.406: U8.4 23.09,13.66 v22.29,12.86
  Bottom 0.406: v22.29,12.86 21.43,12.86 18.35,15.95 R5.2
RD-  (via drill 0.6)
  Top 0.406: U8.3 22.29,15.09 20.4,13.2 v18.69,13.2
  Bottom 0.406: v18.69,13.2 16.55,13.2 R4.2
RESET  (via drill 0.6)
  Top 0.406: v12.34,20.23 11.51,19.57 10.28,19.57 S2.B2 10.13,19.57 10.13,19.37 5.83,19.37 3.77,21.43 3.77,21.77 R11.1 2.39,24.88 D3.A | v25.2,19.37 30.43,19.37 U8.13 31.32,19.43 32.4,18.35 33.95,18.35 35.32,16.97 35.32,11.14 36,10.46 v36,9.94 36,9.26 37.03,8.23 38.92,8.23 39.43,8.74 v43.72,8.74 | v47.66,26.58 47.66,25.03 46.12,23.49 46.12,12.34 v46.81,11.66
  Bottom 0.406: ICSP.5 28.84,8.6 29.32,9.09 35.15,9.09 v36,9.94 | v12.34,20.23 13.54,20.23 16.12,17.66 24.86,17.66 25.37,18.17 25.37,19.2 v25.2,19.37 | IC1.14 43.05,25.7 43.72,25.03 45.43,25.03 46.29,25.89 46.98,25.89 v47.66,26.58 | v43.72,8.74 43.89,8.74 v46.81,11.66
RXBEE  (via drill 0.6)
  Top 0.406: U8.20 39.43,25.03 v39.61,24.86 | v55.04,30 56.24,30 61.38,35.15 63.63,35.15 U1.P$13
  Bottom 0.406: v55.04,30 54.86,29.83 54.86,27.78 54.18,27.09 50.92,27.09 49.03,25.2 46.63,25.2 45.61,24.17 40.29,24.17 v39.61,24.86
RXLED  (via drill 0.6)
  Top 0.406: U8.8 26.29,14.86 26.92,14.23 27.26,14.23 28.29,13.2 28.29,12 26.92,10.63 26.23,10.63 25.89,10.29 25.89,8.74 25.37,8.23 23.15,8.23 v22.46,7.54 | R13.1 13.45,2.4 11.14,2.4 v10.8,2.74
  Bottom 0.406: v10.8,2.74 11.49,3.43 20.4,3.43 22.46,5.49 v22.46,7.54
S0
  Top 0.406: IDC.3 6.18,32.74 8.23,30.69 8.23,24.86 10.46,22.63 16.12,22.63 16.97,21.77 18.83,21.77 U8.40
S1
  Top 0.406: U8.41 16.69,21.03 15.77,21.95 10.12,21.95 7.37,24.69 7.37,30.52 6.34,31.55 3.94,31.55 3.26,32.23 3.26,32.67 IDC.4
S2
  Top 0.406: IDC.5 6.38,35.28 9.94,31.72 9.94,25.55 11.49,24 16.8,24 17.37,23.43 U8.38
S3
  Top 0.406: U8.39 17.15,22.63 16.46,23.32 10.97,23.32 9.09,25.2 9.09,31.2 6.34,33.95 3.43,33.95 3.26,34.12 3.26,35.21 IDC.6
S4
  Top 0.406: U8.36 17.83,25.03 17.32,25.55 12.17,25.55 11.66,26.06 11.66,32.4 6.86,37.21 6.34,37.21 IDC.7
S5
  Top 0.406: U8.37 17.6,24.23 16.97,24.86 11.66,24.86 10.8,25.72 10.8,32.06 6.34,36.52 3.6,36.52 3.26,36.86 3.26,37.75 IDC.8
SCK  (via drill 0.6)
  Top 0.406: U8.9 27.09,15.6 29.32,13.37 30.35,13.37 30.69,13.03 v30.69,11.83 31.38,11.83 ICSP.3
  Bottom 0.406: IC1.3 43.05,14.59 41.83,13.37 39.09,13.37 37.89,14.57 34.8,14.57 31.89,11.66 30.86,11.66 v30.69,11.83
SCL  (via drill 0.6)
  Top 0.406: v41.15,34.98 38.92,32.75 38.92,27.43 39.26,27.09 41.32,27.09 41.83,26.58 41.83,23.83 40.63,22.63 39.26,22.63 39.09,22.8 38.06,22.8 37.38,23.49 37.32,23.43 U8.18 26.12,23.43 v24.35,25.38 | v49.03,34.12 49.03,33.95 50.58,32.4 51.78,32.4 v52.98,31.2
  Bottom 0.406: IC3.6 46.07,39.48 46.46,39.09 46.46,38.75 46.81,38.41 48.01,38.41 48.35,38.06 48.35,35.49 47.83,34.98 | 47.83,34.98 47.06,34.98 R1.1 | v41.15,34.98 41.83,34.98 45.09,31.72 51.61,31.72 52.12,31.2 v52.98,31.2 | 47.83,34.98 48.18,34.98 v49.03,34.12 | 13.37,28.98 15.43,28.98 15.77,29.32 17.32,29.32 20.75,25.89 24,25.89 24.35,25.55 v24.35,25.38 | 13.37,28.98 11.83,28.98 10.46,30.35 10.46,38.41 9.43,39.43 7.2,39.43 6.86,39.09 3.77,39.09 3.26,39.61 3.26,40.29 IDC.10 | IC4.6 11.44,27.04 13.37,28.98
SDA  (via drill 0.6)
  Top 0.406: 42.01,37.72 v42.69,37.03 41.83,37.89 39.95,37.89 39.26,37.21 39.26,34.46 38.06,33.26 38.06,26.75 38.4,26.4 40.29,26.4 40.98,25.72 40.98,24 40.46,23.49 38.58,23.49 37.83,24.23 U8.19 27.89,24.23 v26.75,25.38 | v7.89,37.89 7.89,39.09 6.69,40.29 5.8,40.29 IDC.9
  Bottom 0.406: v42.69,37.03 43.3,36.43 R9.1 44.92,34.29 46.63,32.58 50.23,32.58 50.75,33.09 50.75,36.86 48.01,39.61 47.49,39.61 47.32,39.78 47.32,40.38 IC3.5 | IDC.9 5.8,40.29 10.46,40.29 11.32,39.26 11.32,30.86 12.17,30 15.09,30 15.43,30.35 17.83,30.35 21.09,27.09 25.03,27.09 v26.75,25.38 | IC4.5 7.57,37.52 v7.89,37.89
SLEEP  (via drill 0.6)
  Top 0.406: U8.25 27.09,29.32 28.29,30.52 28.29,31.89 28.98,32.58 31.2,32.58 32.06,31.72 v32.06,30.86
  Bottom 0.406: IC1.11 39.26,27.27 39.26,28.98 40.46,30.18 41.32,30.18 42.35,31.2 42.35,32.92 41.83,33.43 39.61,33.43 38.06,31.89 35.49,31.89 33.78,30.18 32.92,30.18 v32.06,30.86
TXBEE  (via drill 0.6)
  Top 0.406: U8.21 32.86,25.83 34.98,27.95 34.98,29.49 35.32,29.83 36.18,29.83 v36.52,29.49
  Bottom 0.406: 36.69,27.26 IC1.9 36.7,29.31 v36.52,29.49
TXLED  (via drill 0.6)
  Top 0.406: U8.22 30.49,27.92 v31.2,28.63
  Bottom 0.406: R12.1 29.15,28.12 30,28.98 30.86,28.98 v31.2,28.63
UCAP
  Top 0.406: U8.6 24.69,11.14 24.35,10.8 C12.1
UGND  (via drill 0.6)
  Top 0.406: U8.5 23.89,11.89 22.63,10.63 C12.2 22.47,10.12 15.94,10.12 15.6,9.77 15.6,7.72 14.92,7.03 14.92,6 14.57,5.66 12.17,5.66 10.97,4.46 7.72,4.46 6.69,5.49 v6.69,6.34 7.99,7.64 L2.1 7.9,8.49 JMP1.1
  Bottom 0.406: v6.69,6.34 5.83,6.34 4.97,7.2 4.97,11.59 3.7,12.86 3.7,15.35 4.63,16.27 5.61,16.27 6.37,17.03 8.17,17.03 X1.5 8.21,17.03
VBAT
  Top 0.61: U7.3 32.5,49.11 33.09,48.52 33.09,47.23 C13.1
  pour Top: 15.09,53.15 14.23,53.15 13.54,52.46 13.54,51.78 14.23,51.09 16.29,51.09 17.83,49.55 20.75,49.55 21.77,48.52 21.77,45.78 21.09,45.09 21.09,44.41 21.95,43.55 33.95,43.55 34.46,44.06 34.46,47.66 33.43,47.49 32.58,47.49 32.58,46.12 32.23,45.78 26.75,45.78 25.55,46.98 25.55,50.75 24.69,51.61 21.95,51.61 20.75,52.81 19.72,52.81 18.86,51.95 16.29,51.95
VBAT1  (via drill 0.6)
  Top 0.406: Q2.1 Q2.2 Q2.3 | v23.32,41.66 23.66,41.83 | U8.27 25.49,29.78 v26.57,30.86
  Bottom 0.406: IDC.2 IDC.1 2.37,30.2 1.54,31.03 1.54,40.98 2.23,41.66 12.52,41.66 13.03,42.18 22.8,42.18 v23.32,41.66 | 24.2,42.26 23.74,42.26 v23.32,41.66 | 18.77,49.81 18.86,49.89 24.35,49.89 25.33,50.88 U5.4 | 18.77,49.81 17.49,48.52 17.49,46.98 18.69,45.78 22.38,45.78 C3.1 | R20.2 18.1,50.49 18.77,49.81 | v23.32,41.66 24,42.35 24,45.95 24.17,46.12 | C3.1 23.07,46.37 | U5.1 25.3,47.07 24.35,46.12 24.17,46.12 | 24.17,46.12 23.22,46.12 C3.1 | v26.57,30.86 26.57,33.09 24.52,35.15 24.52,40.46 v23.32,41.66
  pour Top: 18,39.78 18,40.12 18.52,40.63 20.75,40.63 20.92,40.81 20.92,41.83 21.77,42.69 25.72,42.69 26.23,42.18 26.23,40.46 26.4,40.29 28.8,40.29 29.49,39.6 29.49,38.58 29.15,38.23 23.49,38.23 23.15,37.89 18.52,37.89 18.17,38.23
VIN  (via drill 0.6)
  Top 0.406: C37.1 47.15,41.07 47.15,43.38 47.78,44.01 U4.7 47.78,49.43 47.32,49.89 44.41,49.89 44.23,50.06 44.23,51.61 43.89,51.95 41.15,51.95 39.78,50.58 39.43,50.58 38.58,49.72 38.58,49.04 38.23,48.69 34.98,48.69 34.46,48.18 34.46,43.89 34.12,43.55 28.29,43.55 27.77,44.06 v26.75,44.06 22.29,44.06 v22.46,44.23 22.29,44.23
  Bottom 0.406: R17.2 21.95,43.72 v22.46,44.23 | v26.75,44.06 26.75,39.51 R10.2
  other vias: 50.75,41.32 52.12,40.46
  pour Top: 42.86,44.23 43.03,44.23 43.38,43.89 43.72,43.89 43.89,43.72 43.89,40.98 44.41,40.46 46.29,40.46 46.81,40.98 46.81,41.83 51.44,41.83 52.81,40.81 51.78,39.95 43.38,39.95 41.66,41.66 41.66,43.72 42.01,44.06
  pour Bottom: 64.98,46.98 65.67,46.29 65.67,44.41 65.15,43.89 56.24,43.89 55.55,43.21 55.55,41.32 53.32,38.75 50.06,38.75 49.55,39.26 49.55,40.81 55.38,46.98 57.95,46.98
VTPS  (via drill 0.6)
  other vias: 10.63,44.23 13.89,43.55 15.43,48.86 12.34,50.41 13.89,49.38 12.34,44.23
  pour Top: 13.54,37.38 12.86,37.38 11.83,38.4 11.83,41.15 9.77,43.21 9.77,44.75 10.12,45.09 13.03,45.09 14.06,44.06 14.4,44.06 15.09,43.38 15.09,38.4
  pour Top: 11.49,52.64 11.49,49.21 12,48.69 13.89,48.69 14.92,47.66 16.12,47.66 16.63,48.18 16.63,49.38 15.94,50.06 13.54,50.06 12.69,50.92 12.69,52.12 12,52.81
  pour Bottom: 12.86,51.61 11.49,51.61 10.8,50.92 10.8,46.81 9.6,45.61 9.6,43.89 10.46,43.03 14.06,43.03 14.74,43.72 14.74,46.12 16.63,48.01 16.63,49.55 15.77,50.41 14.23,50.41
VUSB  (via drill 0.6)
  Top 0.406: v26.57,12.52 26.23,12.52 25.49,13.26 U8.7 | C24.2 37.04,39.27 37.38,38.92 37.38,33.78 33.43,29.83 v33.43,28.8
  Top 0.813: 37.08,41.01 C24.2 C11.2
  Bottom 0.406: F2.1 22.12,9.26 24.86,12 26.06,12 v26.57,12.52 26.57,12.69 27.6,13.72 27.6,22.63 29.49,24.52 31.55,24.52 33.43,26.4 v33.43,28.8
  pour Top: 35.49,43.72 35.49,48.01 35.83,48.35 38.75,48.35 39.26,47.83 39.26,46.29 38.06,45.09 38.06,44.41 36.52,42.69
XTAL1
  Top 0.406: U8.17 34.97,22.63 R18.1 36.17,21.94 36.52,21.95 37.86,21.95 Y2.3
XTAL2
  Top 0.406: U8.16 33.03,21.83 34.8,20.06 35.14,20.06 R18.2 35.64,19.92 Y2.1
XUSB
  Bottom 0.406: F2.2 11.83,9.26 10.46,10.63 10.46,12.69 9.32,13.83 8.21,13.83 X1.1

## Text on the board
tPlace: + | + | 1
bPlace: SCK Base Board v1.0 | Designed in Barcelona